# EAGLE board electricalScheme (EAGLE 9.7.0)

Size 155.46 x 109.01 mm. Coordinates in mm from the lower left corner, seen from the top.
Outline: 0,0 155.46,0 155.46,109.01 0,109.01 0,0
Copper layers (1*16): Top 0.035mm / dielectric 1.5mm / Bottom 0.035mm
Design rules "default": minimum track width 6mil, minimum drill 0.35mm, track to track 6mil, track to pad 6mil, pad to pad 6mil, via to via 6mil, smd to smd 6mil, copper to edge 40mil, drill to drill 6mil, minimum pad ring 10mil, minimum via ring 8mil, stop-mask expansion 4mil, vias tented up to drill 0mil, thermal gap 10mil

## Footprints (pad centres in the part's own frame; a part is rotated, then mirrored left to right if it is on the bottom)
LEDRD254W60D565H860B = drill 0.981 pad 1.581: 1 -1.27,0; 2 1.27,0
LEDRD254W60D565H860B_B = drill 0.981 pad 1.581: 1 -1.27,0; 2 1.27,0
LEDRD254W60D565H860B_Y = drill 0.981 pad 1.581: 1 -1.27,0; 2 1.27,0
LEDRD254W60D565H860B_G = drill 0.981 pad 1.581: 1 -1.27,0; 2 1.27,0
RESAD1016W63L850D250B = drill 0.83 pad 1.43: 1 -5.08,0; 2 5.08,0
SWITCH-MOMENTARY-PTH-6.5MM = drill 1.016 pad 1.88: 1 -3.251,2.261; 2 3.251,2.261; 3 -3.251,-2.261; 4 3.251,-2.261
ARDUINO-UNO-R3-SHIELD = drill 1.016 pad 1.88: 3.3V 24.13,-2.54; 5V 24.13,0; A0 24.13,12.7; A1 24.13,15.24; A2 24.13,17.78; A3 24.13,20.32; A4 24.13,22.86; A5 24.13,25.4; AREF -24.13,-13.97; D2 -24.13,20.32; D3 -24.13,17.78; D4 -24.13,15.24; D5 -24.13,12.7; D6 -24.13,10.16; D7 -24.13,7.62; D8 -24.13,3.81; D9 -24.13,1.27; D10 -24.13,-1.27; D11 -24.13,-3.81; D12 -24.13,-6.35; D13 -24.13,-8.89; GND@0 24.13,2.54; GND@1 24.13,5.08; GND@2 -24.13,-11.43; IOREF 24.13,-7.62; NC 24.13,-10.16; RES 24.13,-5.08; RX -24.13,25.4; SCL -24.13,-19.05; SDA -24.13,-16.51; TX -24.13,22.86; VIN 24.13,7.62

## Placement (x,y rotation side)
DGAMEOVER  RED  [LEDRD254W60D565H860B]  118,8.05 0 top
DLED1  BLUE  [LEDRD254W60D565H860B_B]  140.86,30.91 180 top
DLED2  RED  [LEDRD254W60D565H860B]  123.08,30.91 180 top
DLED3  YELLOW  [LEDRD254W60D565H860B_Y]  105.3,30.91 180 top
DLED4  GREEN  [LEDRD254W60D565H860B_G]  87.52,30.91 180 top
DWELLDONE  GREEN  [LEDRD254W60D565H860B_G]  135.78,8.05 180 top
R3  220  [RESAD1016W63L850D250B]  86.25,18.21 90 top
R4  220  [RESAD1016W63L850D250B]  104.03,18.21 90 top
R6  220  [RESAD1016W63L850D250B]  121.81,18.21 90 top
R7  220  [RESAD1016W63L850D250B]  139.59,18.21 90 top
SBUTTON1  SWITCH_MOMENTARY  [SWITCH-MOMENTARY-PTH-6.5MM]  147.21,19.48 90 top
SBUTTON2  SWITCH_MOMENTARY  [SWITCH-MOMENTARY-PTH-6.5MM]  129.43,19.48 90 top
SBUTTON3  SWITCH_MOMENTARY  [SWITCH-MOMENTARY-PTH-6.5MM]  111.65,19.48 90 top
SBUTTON4  SWITCH_MOMENTARY  [SWITCH-MOMENTARY-PTH-6.5MM]  93.87,19.48 90 top
USIMON_GAME  ARDUINO-UNO-R3-SHIELD  [ARDUINO-UNO-R3-SHIELD]  47.88,79.17 270 top

## Library data of the parts
DGAMEOVER DLED2 = Tinkercad; CATEGORY: Opto-Electronic; SUB-CATEGORY: LED; VALUE: LED_RED
DLED1 = Tinkercad; CATEGORY: Opto-Electronic; SUB-CATEGORY: LED; VALUE: LED_BLUE
DLED3 = Tinkercad; CATEGORY: Opto-Electronic; SUB-CATEGORY: LED; VALUE: LED_YELLOW
DLED4 DWELLDONE = Tinkercad; CATEGORY: Opto-Electronic; SUB-CATEGORY: LED; VALUE: LED_GREEN
R3 R4 R6 R7 SBUTTON1-SBUTTON4 USIMON_GAME = Tinkercad

## Nets
DLED1_C: DLED1.2 R7.2
DLED2_C: DLED2.2 R6.2
DLED3_C: DLED3.2 R4.2
DLED4_C: DLED4.2 R3.2
USIMON_GAME_5V: SBUTTON1.3 SBUTTON1.4 SBUTTON2.3 SBUTTON2.4 SBUTTON3.3 SBUTTON3.4 SBUTTON4.3 SBUTTON4.4 USIMON_GAME.5V
USIMON_GAME_D2: DWELLDONE.1 USIMON_GAME.D2
USIMON_GAME_D3: SBUTTON1.1 SBUTTON1.2 USIMON_GAME.D3
USIMON_GAME_D4: SBUTTON2.1 SBUTTON2.2 USIMON_GAME.D4
USIMON_GAME_D5: SBUTTON3.1 SBUTTON3.2 USIMON_GAME.D5
USIMON_GAME_D6: SBUTTON4.1 SBUTTON4.2 USIMON_GAME.D6
USIMON_GAME_D8: DLED1.1 USIMON_GAME.D8
USIMON_GAME_D9: DLED2.1 USIMON_GAME.D9
USIMON_GAME_D10: DLED3.1 USIMON_GAME.D10
USIMON_GAME_D11: DLED4.1 USIMON_GAME.D11
USIMON_GAME_D13: DGAMEOVER.1 USIMON_GAME.D13
USIMON_GAME_GND: DGAMEOVER.2 DWELLDONE.2 R3.1 R4.1 R6.1 R7.1 USIMON_GAME.GND@0 USIMON_GAME.GND@1 USIMON_GAME.GND@2

## Tracks (layer width: path | path; a pad name or v marks a point on that pad's centre or on a via)
DLED1_C  (1 unrouted)
DLED2_C  (1 unrouted)
DLED3_C  (1 unrouted)
DLED4_C  (1 unrouted)
USIMON_GAME_5V  (8 unrouted)
USIMON_GAME_D2  (1 unrouted)
USIMON_GAME_D3  (2 unrouted)
USIMON_GAME_D4  (2 unrouted)
USIMON_GAME_D5  (2 unrouted)
USIMON_GAME_D6  (2 unrouted)
USIMON_GAME_D8  (1 unrouted)
USIMON_GAME_D9  (1 unrouted)
USIMON_GAME_D10  (1 unrouted)
USIMON_GAME_D11  (1 unrouted)
USIMON_GAME_D13  (1 unrouted)
USIMON_GAME_GND  (8 unrouted)